# Altium PCB PCB5.PcbDoc
Units mil, origin at the board's own origin, x right, y up, seen from the top; angles counter-clockwise.
Board outline 6000 x 4000 mil, 2 copper layers (Top Layer, Bottom Layer); 86 components, 57 nets, 223 pads, 2 vias.
Unrouted connection lines stored in the file: 23.
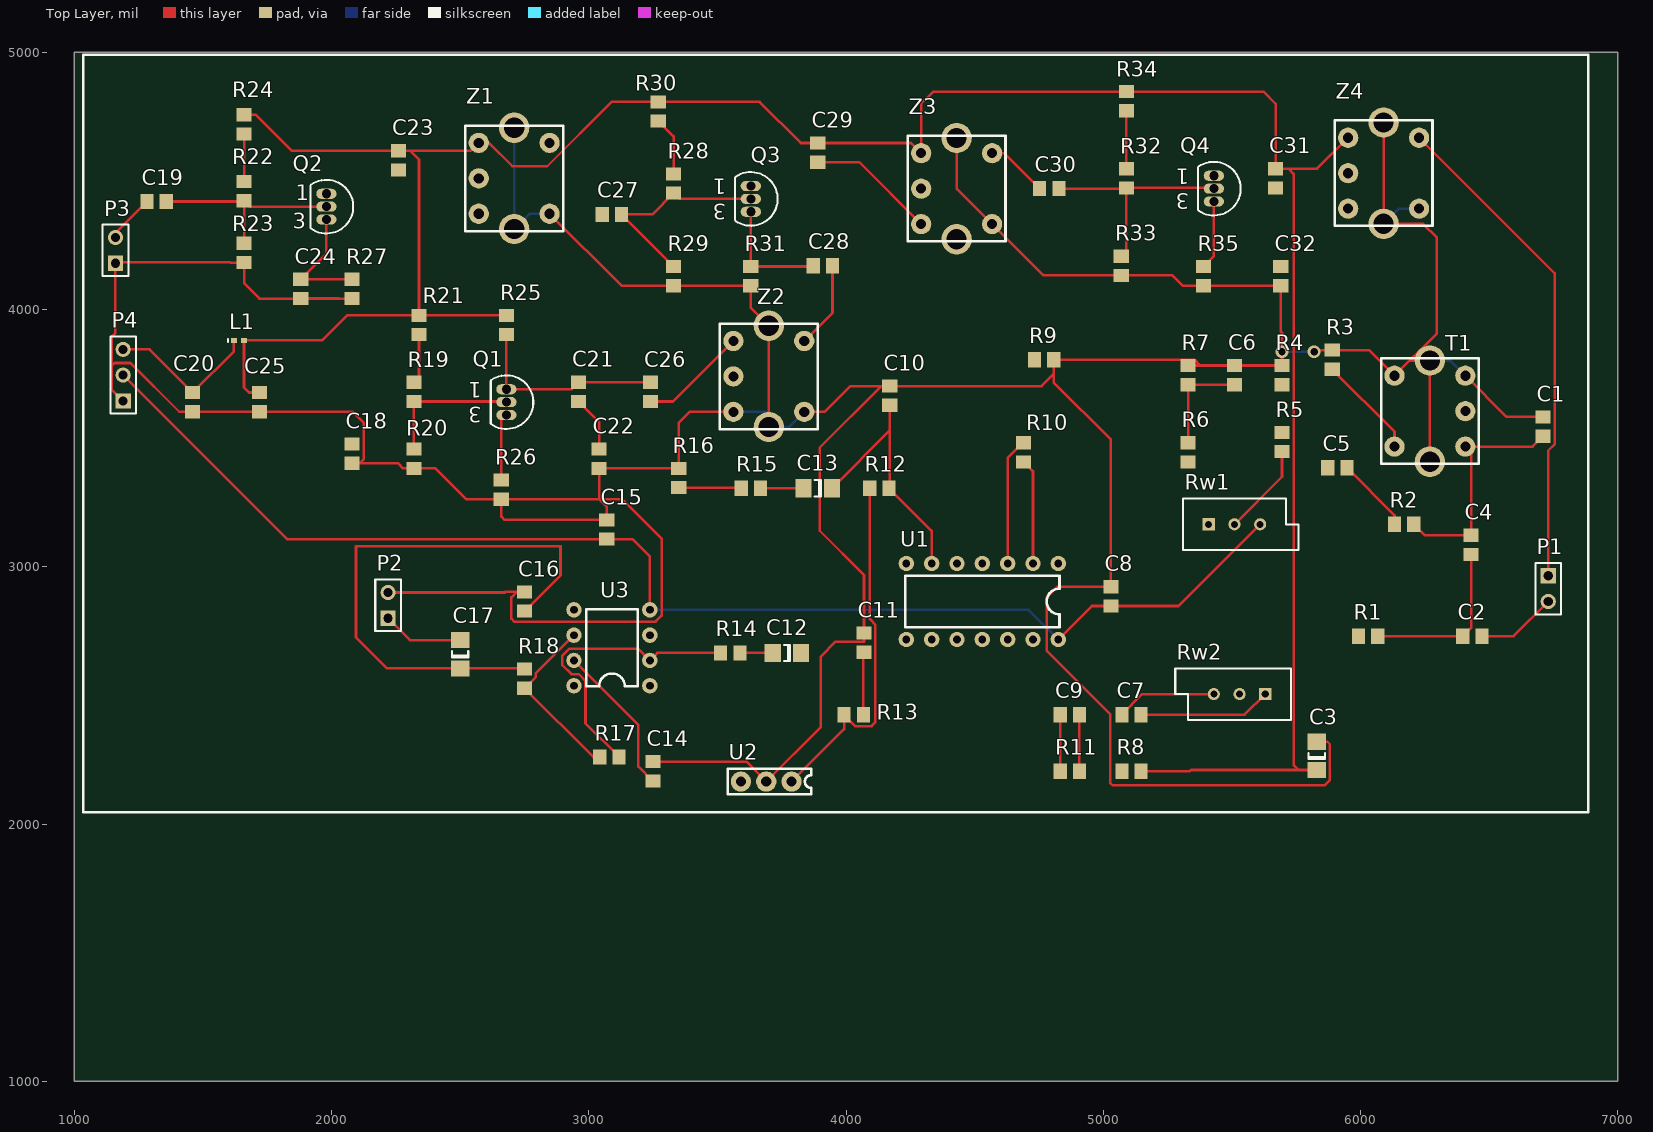
[diagram p0: Top Layer view]
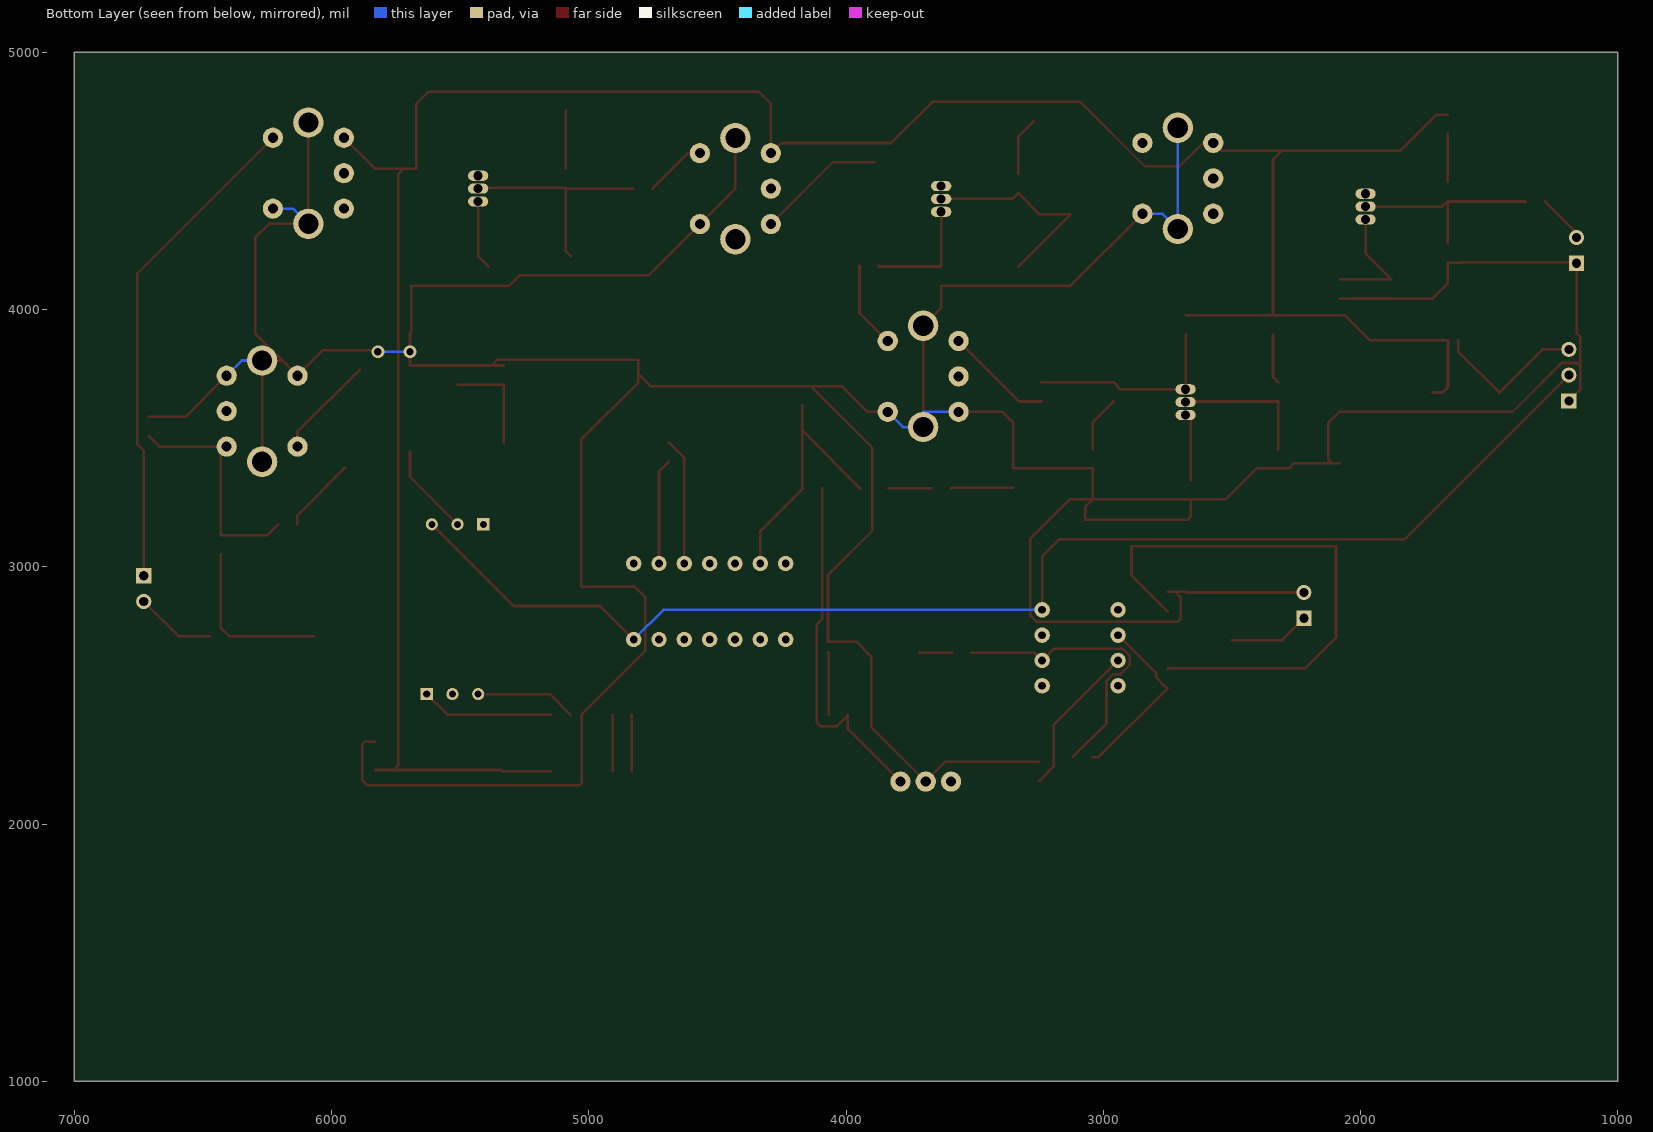
[diagram p1: Bottom Layer view, seen from below]

## Layer stack, top to bottom
Top Layer: signal copper 1.4
Dielectric: dielectric 12.6, FR-4, Dk 4.8
Bottom Layer: signal copper 1.4

## Board outline
1000,1000 7000,1000 7000,5000 1000,5000

## Design rules (kind name [scope] priority, off if disabled: settings)
Clearance [All] p1: gap=10
PolygonConnect [All] p1: connectstyle=Relief reliefconductorwidth=10 reliefentries=4 polygonreliefangle="90 Angle"
RoomDefinition Sheet1 [InComponentClass('Sheet1')] p1: confinementstyle=ConfineIn formatcopy=TRUE lockcomponents=FALSE outline 0,0 2000,0 2000,1000 0,1000
RoomDefinition Sheet2 [InComponentClass('Sheet2')] p2: confinementstyle=ConfineIn formatcopy=TRUE lockcomponents=FALSE outline 0,0 2000,0 2000,1000 0,1000
RoutingVias [All] p1: holewidth=28 width=50 viastyle="Through Hole" minholewidth=28 minwidth=50 maxholewidth=28 maxwidth=50
SilkscreenOverComponentPads [All] p1: minsilkscreentomaskgap=10
SolderMaskExpansion [All] p1: expansion=4
TestPointUsage [All] p1: valid=0 allowmultiple=FALSE
Testpoint [All] p1: side=15 testpointundercomponent=TRUE minsize=40 maxsize=100 preferedsize=60 minholesize=0 maxholesize=40 preferedholesize=32 testpointgrid=1 style=1023 order=0123456789
Width [All] p1: maxlimit=10 minlimit=10 preferedwidth=10
23 further rules are at their usual default settings.

## Classes and differential pairs
component class Sheet2: C18 C19 C20 C21 C22 C23 C24 C25 C26 C27 C28 C29 C30 C31 C32 L1 P3 P4 Q1 Q2 Q3 Q4 R19 R20 R21 R22 R23 R24 R25 R26 R27 R28 R29 R30 R31 R32 R33 R34 R35 Z1 Z2 Z3 Z4
component class Sheet1: C1 C2 C3 C4 C5 C6 C7 C8 C9 C10 C11 C12 C13 C14 C15 C16 C17 P1 P2 R1 R2 R3 R4 R5 R6 R7 R8 R9 R10 R11 R12 R13 R14 R15 R16 R17 R18 Rw1 Rw2 T1 U1 U2 U3

## Components (designator, comment, footprint, x,y, rotation, side; value= is the part's Value field where it differs from the comment)
C1 "Cap" 2012[0805] 6710,3545 r270 top
C2 "Cap" 2012[0805] 6435,2730 r180 top
C3 "Cap Pol1" C1206 5830,2265 r90 top
C4 "Cap" 2012[0805] 6430,3085 r270 top
C5 "Cap" 2012[0805] 5910,3385 r180 top
C6 "Cap" 2012[0805] 5510,3745 r270 top
C7 "Cap" 2012[0805] 5110,2425 r180 top
C8 "Cap" 2012[0805] 5030,2885 r270 top
C9 "Cap" 2012[0805] 4870,2425 r180 top
C10 "Cap" 2012[0805] 4170,3665 r270 top
C11 "Cap" 2012[0805] 4070,2705 r270 top
C12 "Cap Pol1" C1206 3770,2665 r180 top
C13 "Cap Pol1" C1206 3890,3305 r180 top
C14 "Cap" 2012[0805] 3250,2205 r270 top
C15 "Cap" 2012[0805] 3070,3145 r270 top
C16 "Cap" 2012[0805] 2750,2865 r270 top
C17 "Cap Pol1" C1206 2500,2660 r90 top
C18 "Cap" 2012[0805] 2080,3440 r270 top
C19 "Cap" 2012[0805] 1320,4420 r0 top
C20 "Cap" 2012[0805] 1460,3640 r90 top
C21 "Cap" 2012[0805] 2960,3680 r270 top
C22 "Cap" 2012[0805] 3040,3420 r270 top
C23 "Cap" 2012[0805] 2260,4580 r270 top
C24 "Cap" 2012[0805] 1880,4080 r90 top
C25 "Cap" 2012[0805] 1720,3640 r90 top
C26 "Cap" 2012[0805] 3240,3680 r90 top
C27 "Cap" 2012[0805] 3090,4370 r0 top
C28 "Cap" 2012[0805] 3910,4170 r0 top
C29 "Cap" 2012[0805] 3890,4610 r270 top
C30 "Cap" 2012[0805] 4790,4470 r0 top
C31 "Cap" 2012[0805] 5670,4510 r270 top
C32 "Cap" 2012[0805] 5690,4130 r90 top
L1 "Inductor" 0402-A 1640,3880 r0 top
P1 "Header 2" HDR1X2 6730,2965 r270 top
P2 "Header 2" HDR1X2 2220,2800 r90 top
P3 "Header 2" HDR1X2 1160,4180 r90 top
P4 "Header 3" HDR1X3 1190,3645 r90 top
Q1 "NPN" TO-226 2680,3640 r180 top
Q2 "NPN" TO-226 1980,4400 r180 top
Q3 "NPN" TO-226 3630,4430 r180 top
Q4 "NPN" TO-226 5430,4470 r180 top
R1 "Res1" 2012[0805] 6030,2730 r180 top
R2 "Res1" 2012[0805] 6170,3165 r180 top
R3 "Res1" 2012[0805] 5890,3805 r270 top
R4 "Res1" 2012[0805] 5695,3745 r270 top
R5 "Res1" 2012[0805] 5695,3485 r270 top
R6 "Res1" 2012[0805] 5330,3445 r270 top
R7 "Res1" 2012[0805] 5330,3745 r270 top
R8 "Res1" 2012[0805] 5110,2205 r180 top
R9 "Res1" 2012[0805] 4770,3805 r180 top
R10 "Res1" 2012[0805] 4690,3445 r270 top
R11 "Res1" 2012[0805] 4870,2205 r180 top
R12 "Res1" 2012[0805] 4130,3305 r180 top
R13 "Res1" 2012[0805] 4030,2425 r180 top
R14 "Res1" 2012[0805] 3550,2665 r180 top
R15 "Res1" 2012[0805] 3630,3305 r180 top
R16 "Res1" 2012[0805] 3350,3345 r270 top
R17 "Res1" 2012[0805] 3080,2260 r180 top
R18 "Res1" 2012[0805] 2750,2565 r270 top
R19 "Res1" 2012[0805] 2320,3680 r90 top
R20 "Res1" 2012[0805] 2320,3420 r90 top
R21 "Res Adj1" 2012[0805] 2340,3940 r270 top
R22 "Res1" 2012[0805] 1660,4460 r90 top
R23 "Res1" 2012[0805] 1660,4220 r90 top
R24 "Res Adj1" 2012[0805] 1660,4720 r270 top
R25 "Res1" 2012[0805] 2680,3940 r90 top
R26 "Res1" 2012[0805] 2660,3300 r90 top
R27 "Res1" 2012[0805] 2080,4080 r90 top
R28 "Res1" 2012[0805] 3330,4490 r90 top
R29 "Res1" 2012[0805] 3330,4130 r90 top
R30 "Res Adj1" 2012[0805] 3270,4770 r270 top
R31 "Res1" 2012[0805] 3630,4130 r90 top
R32 "Res1" 2012[0805] 5090,4510 r90 top
R33 "Res1" 2012[0805] 5070,4170 r90 top
R34 "Res Adj1" 2012[0805] 5090,4810 r270 top
R35 "Res1" 2012[0805] 5390,4130 r90 top
Rw1 "RPot" VR5 5510,3165 r0 top
Rw2 "RPot" VR5 5530,2505 r180 top
T1 "zhongzhou" zhongzhou 6270,3605 r180 top
U1 "MC1496" MC1496 4530,2865 r180 top
U2 "LM7808" LM7808 3690,2165 r180 top
U3 "LM741" LM741 3090,2685 r180 top
Z1 "zhongzhou1" zhongzhou 2710,4510 r0 top
Z2 "zhongzhou4" zhongzhou 3700,3740 r0 top
Z3 "zhongzhou2" zhongzhou 4430,4470 r0 top
Z4 "zhongzhou3" zhongzhou 6090,4530 r0 top

## Footprints (in the part's own frame and the unit in brackets; to place one, negate y for a bottom-side part, rotate by r counter-clockwise, add the part's x,y. Pads: shape width x height; smd on the part's side, far side on the other; paste and mask are expansions set on the pad)
0402-A [mm] "Chip Inductor; Body 1 x 0.5 mm (LxW typ)"
  rect 0.6x0.5 smd: 1(-0.5,0) 2(0.5,0)
  silkscreen extent -1.1,-0.15 -1.1,0.15
2012[0805] [mm] "Chip Resistor; Body 2.0 x 1.3 mm (LxW typ)"
  rect 1.3x1.5 smd: 1(-0.95,0) 2(0.95,0)
C1206 [mm] "Chip Capacitor; Body 3.2 x 1.6 mm (LxW typ)"
  rect 1.6x1.8 smd: 1(-1.4,0) 2(1.4,0)
  silkscreen extent -0.3,-0.8 0.3,0.8
HDR1X2 [mm] "Connector; Header; 2 Position"
  rect 1.5x1.5 hole 0.9: 1(0,0)
  round 1.5 hole 0.9: 2(2.54,0)
  silkscreen extent -1.27,-1.27 3.81,1.27
HDR1X3 [mm] "Connector; Header; 3 Position"
  rect 1.5x1.5 hole 0.9: 1(0,0)
  round 1.5 hole 0.9: 2(2.54,0) 3(5.08,0)
  silkscreen extent -1.27,-1.27 6.35,1.27
LM741 [mil]
  round 60 hole 30: 1(-147.64,147.64) 2(-147.64,49.21) 3(-147.64,-49.21) 4(-147.64,-147.64) 5(147.64,-147.64) 6(147.64,-49.21) 7(147.64,49.21) 8(147.64,147.64)
  silkscreen extent -100,-150 100,150
LM7808 [mm]
  round 2 hole 1: 1(-2.5,0) 2(0,0) 3(2.5,0)
  silkscreen extent -4.44,-1.27 3.81,1.27
MC1496 [mil]
  round 60 hole 30: 1(-295.28,-147.64) 2(-196.85,-147.64) 3(-98.43,-147.64) 4(0,-147.64) 5(98.43,-147.64) 6(196.85,-147.64) 7(295.28,-147.64) 8(295.28,147.64) 9(196.85,147.64) 10(98.43,147.64) 11(0,147.64) 12(-98.43,147.64) 13(-196.85,147.64) 14(-295.28,147.64)
  silkscreen extent -300,-100 300,100
TO-226 [mm] "TO, Flat Index; 3 In-Line, Axial Leads; Body Dia. 4.8mm; Leads 0.55 x 0.51 mm (max)"
  oval 2x1 hole 0.9: 1(0,-1.27) 2(0,0) 3(0,1.27)
  silkscreen extent -2.65,-2.65 1.55,2.65
VR5 [mm] "Potentiometer; 3 Leads"
  rect 1.2x1.2 hole 0.7: 1(-2.54,0)
  round 1.2 hole 0.7: 2(0,0) 3(2.54,0)
  silkscreen extent -5.08,-2.54 6.35,2.54
zhongzhou [mm]
  round 2 hole 1: 1(-3.5,3.5) 2(-3.5,0) 3(-3.5,-3.5) 4(3.5,-3.5) 5(3.5,3.5)
  round 3 hole 2: 6(0,5) 7(0,-5)
  silkscreen extent -4.83,-5.21 4.83,5.21

## Part data
C1 C2 C4 C5 C6 C7 C8 C9 C10 C11 C14 C15 C16 C18 C19 C20 C21 C22 C23 C24 C25 C26 C27 C28 C29 C30 C31 C32: "Capacitor"
C3 C12 C13 C17: "Polarized Capacitor (Radial)"
P1 P2 P3: "Header, 2-Pin"
P4: "Header, 3-Pin"
Q1 Q2 Q3 Q4: "NPN Bipolar Transistor"
R1 R2 R3 R4 R5 R6 R7 R8 R9 R10 R11 R12 R13 R14 R15 R16 R17 R18 R19 R20 R22 R23 R25 R26 R27 R28 R29 R31 R32 R33 R35: "Resistor"
R21 R24 R30 R34: "Variable Resistor"
Rw1 Rw2: "Potentiometer"

## Via types
v1: diameter 50, hole 28, Top Layer to Bottom Layer, 2 vias

## Nets (pads, with @x,y where several pads share a name; then routed paths per layer and width w, separated by ;. In a path a pad name is that pad's centre, name@x,y a point inside that pad or via, vN(x,y) a via of type N, cw(c..) or ccw(c..) an arc to the next point about the centre after c; other vN are vias at no path point)
+12V: C3.1 C23.1 C25.2 C29.1 C31.1 L1.2 R8.1 R21.1 R24.1 R25.2 R30.1 R34.1 Z1.1 Z3.1 Z4.1 | length 10221.8
  Top Layer w10: R24.1 1705,4757.4 1845,4617.4 C23.1 ; C25.2 1680,3677.4 1659.69,3697.72 L1.2 1963,3880 2060.4,3977.4 R21.1 ; R25.2 2680,3978 R21.1@2340,3978 ; R8.1 5337,2205 5341.88,2209.88 5760,2209.88 ; C3.1 5760,2209.88 ; Z4.1 5831.81,4547.4 5720,4547.4 ; C23.1 2305,4617.4 ; C23.1 2305,4617.4 ; 2305,4617.4 2541.81,4617.4 Z1.1 2612,4647.8 2702.8,4557 2838.6,4557 3089,4807.4 R30.1 3664.6,4807.4 3824.6,4647.4 C29.1 4252.6,4647.4 Z3.1 4292.2,4800 4339.61,4847.4 R34.1 5622.6,4847.4 5670,4800 C31.1 ; 2305,4617.4 2340,4582.4 R21.1@2340,3978 ; R21.1 R21.1@2340,3978 ; R21.1 R21.1@2340,3978 ; C31.1 5720,4547.4 ; C31.1 5720,4547.4 ; 5720,4547.4 5740,4527.4 5740,2229.88 5760,2209.88
-8V: C8.2 C15.2 P4.2 Rw1.3 U1.14 U3.4 | length 5152.5
  Top Layer w10: P4.2 1827.4,3107.6 C15.2 3170.04,3107.6 3237.64,3040 U3.4 ; U1.14 4955.51,2847.6 C8.2 5292.6,2847.6 Rw1.3
  Bottom Layer w10: U3.4 4710,2832.64 U1.14
GND: C1.1 C3.2 C6.1 C8.1 C10.1 C11.1 C14.1 C15.1 C16.1 C18.2 C20.1 C22.2 C24.1 C25.1 C32.1 P2.2 P3.1 P4.1 R3.1 R4.1 R7.1 R9.1 R16.1 R20.1 R23.1 R26.1 R27.1 R29.1 R31.1 R33.1 R35.1 T1.3 T1.4 T1.6 T1.7 U2.2 Z1.4 Z1.6 Z1.7 Z2.3 Z2.4 Z2.6 Z2.7 Z3.4 Z3.6 Z4.4 Z4.6 Z4.7 | length 22173.2
  Top Layer w10: P4.1 1145,3690 ; R27.1 2028.4,4042.6 2028,4043 1880,4043 C24.1 1720,4042.6 1660,4102.6 R23.1 1607.4,4182.6 1607,4183 1163,4183 P3.1 1160,3909 1145,3894 1145,3780 ; P2.2 2673,2900 2675.4,2902.4 2720,2902.4 ; Z1.4 3127.4,4092.6 R29.1 3330,4093 3461,4093 3461.4,4092.6 R31.1 3630,4006.85 Z2.6 Z2.7 ; C14.1 3612.6,2242.4 U2.2 3902,2377 3902,2651 3960,2709 4070,2709 C11.1 4070,2968 3898,3140 3898,3463 4137.4,3702.4 ; Z2.3 3392.2,3602.2 3350,3560 R16.1 3319,3382.4 3318.4,3383 3105,3383 3104.6,3382.6 C22.2 3040,3263 3040.4,3262.6 ; Z2.4 3917.2,3602.2 4017.4,3702.4 4137.4,3702.4 ; Z3.6 4430,4470 Z3.4 4767.4,4132.6 R33.1 5268.4,4132.6 5308.4,4092.6 R35.1 C32.1 5690,3914 5695,3909 v1(5695,3836) ; v1(5820,3836) 5826.4,3842.4 R3.1 6032.6,3842.4 T1.4 ; C3.2 5870.88,2320.12 5881,2310 5881,2171 5860,2150 5037,2150 5027,2160 5027,2427 4780,2674 4780,2880 4823,2923 4976,2923 4976.6,2922.4 C8.1 5030,3494 4807.4,3716.6 4807.4,3749.8 ; Z4.6 Z4.7 6243.85,4333.15 6297,4280 6297,3907.59 6230.63,3841.22 6191.26,3801.85 ; T1.6 T1.7 6191.26,3801.85 ; T1.3 6568.19,3582.4 C1.1 ; 1145,3690 1145,3780 ; 1145,3690 1145,3780 ; 1145,3780 1157,3792 1218.6,3792 1408,3602.6 C20.1 C25.1 2082.4,3602.6 2125,3560 2125,3417.6 2110,3402.6 ; 2110,3402.6 2258,3402.6 2278,3382.6 R20.1 2403.4,3382.6 2523.4,3262.6 R26.1 ; 2110,3402.6 C18.2 2110,3402.6 ; R26.1 3040.4,3262.6 ; R26.1 2660,3195 2672.6,3182.4 C15.1 3070,3233 3040.4,3262.6 ; 2720,2902.4 C16.1 2720,2902.4 ; 2720,2902.4 2699,2881.4 2699,2798 2710,2787 3260,2787 3283,2810 3283,3109 3129.4,3262.6 3040.4,3262.6 ; 4137.4,3702.4 C10.1 ; 4137.4,3702.4 C10.1 ; C10.1 4760,3702.4 4807.4,3749.8 ; 4807.4,3749.8 R9.1 5330,3805 5354.4,3805 5377,3782.4 ; 5377,3782.4 C6.1 R4.1 ; 5377,3782.4 R7.1 5377,3782.4 ; R4.1 v1(5695,3836) ; R4.1 v1(5695,3836) ; T1.4 6191.26,3801.85 ; T1.4 6191.26,3801.85
  Bottom Layer w10: Z1.6 Z1.7 2769.05,4372.2 Z1.4 ; Z2.3 3563,3603 3700,3603 Z2.7 3778.74,3543.15 Z2.4 ; v1(5695,3836) v1(5820,3836) ; Z4.7 6149.05,4392.2 Z4.4 ; T1.7 6348.74,3801.85 T1.3
NetC1_2: C1.2 C4.1 R2.1 T1.1 | length 913.2
  Top Layer w10: R2.1 6250,3122.4 C4.1 6430,3445 T1.1 6669.61,3467.2 C1.2
NetC2_1: C2.1 P1.2 | length 313.5
  Top Layer w10: C2.1 6595,2730 P1.2
NetC2_2: C2.2 C4.2 R1.1 | length 661.2
  Top Layer w10: R1.1 C2.2 6430,2762.4 C4.2
NetC5_1: C5.1 R2.2 | length 296.7
  Top Layer w10: C5.1 6132.6,3199.8 R2.2
NetC5_2: C5.2 R4.2 R5.1 U1.1
NetC6_2: C6.2 R6.1 R7.2 U1.4 | length 405.2
  Top Layer w10: R6.1 R7.2 C6.2
NetC7_1: C7.1 Rw2.1 U1.8 | length 515.7
  Top Layer w10: C7.1 5550,2425 Rw2.1
NetC7_2: C7.2 C9.1 R8.2 R11.1 Rw2.3 | length 611.4
  Top Layer w10: R11.1 C9.1 ; C7.2 5072.6,2426.53 5151.07,2505 Rw2.3
NetC9_2: C9.2 R11.2 | length 220
  Top Layer w10: R11.2 C9.2
NetC10_2: C10.2 C13.1 R12.1 U1.6 | length 1002.7
  Top Layer w10: C13.1 4170,3529.88 ; C10.2 4170,3529.88 ; U1.6 4333.15,3139.25 R12.1 4170,3307.6 4170,3529.88
NetC11_2: C11.2 C12.1 R13.1 U1.12 | length 243.7
  Top Layer w10: R13.1 4067.4,2665 C11.2
NetC12_2: C12.2 R14.1 | length 127.5
  Top Layer w10: R14.1 C12.2
NetC13_2: C13.2 R15.1 | length 167.5
  Top Layer w10: R15.1 C13.2
NetC14_2: C14.2 U2.3 U3.7 | length 596.5
  Top Layer w10: U3.7 3192.64,2385.51 3192.64,2223.43 3248.47,2167.6 C14.2
NetC16_2: C16.2 C17.1 R18.1 | length 2167.1
  Top Layer w10: R18.1 2747.52,2604.88 C17.1 2215.12,2604.88 2095,2725 2095,3080 2890,3080 2890,2966.07 2751.53,2827.6 C16.2
NetC17_2: C17.2 P2.1 | length 315.2
  Top Layer w10: P2.1 2304.88,2715.12 C17.2
NetC18_1: C18.1 Q1.2 R19.1 R20.2 | length 546.3
  Top Layer w10: R20.2 R19.1 2677.4,3642.6 Q1.2
NetC19_1: C19.1 P3.2 | length 190.8
  Top Layer w10: P3.2 1160,4297.4 C19.1
NetC19_2: C19.2 Q2.2 R22.1 R23.2 | length 798.2
  Top Layer w10: C19.2 1657.4,4420 R22.1 ; R23.2 R22.1 ; Q2.2 1682.6,4400 R22.1
NetC20_2: C20.2 L1.1 P4.3 | length 608.4
  Top Layer w10: P4.3 1292.4,3845 C20.2 1620.32,3837.72 L1.1
NetC21_1: C21.1 C26.2 Q1.1 R25.1 | length 783.9
  Top Layer w10: R25.1 Q1.1 2932.6,3690 C21.1 C26.2
NetC21_2: C21.2 C22.1 | length 218.3
  Top Layer w10: C21.2 3040,3562.6 C22.1
NetC23_2: C23.2 Z1.3
NetC24_2: C24.2 Q2.3 R27.2 | length 474
  Top Layer w10: Q2.3 1980,4217.4 C24.2 R27.2
NetC26_1: C26.1 Z2.1 | length 419.6
  Top Layer w10: C26.1 3327.01,3642.6 Z2.1
NetC27_1: C27.1 Z1.5
NetC27_2: C27.2 Q3.2 R28.1 R29.2 | length 832.7
  Top Layer w10: R29.2 C27.2 3247.4,4370 R28.1 3352.6,4430 Q3.2
NetC28_1: C28.1 Q3.3 R31.2 | length 456.3
  Top Layer w10: Q3.3 R31.2 3870,4167.4 C28.1
NetC28_2: C28.2 Z2.5 | length 337.6
  Top Layer w10: Z2.5 3947.4,3987.4 C28.2
NetC29_2: C29.2 Z3.3 | length 501.8
  Top Layer w10: C29.2 4051.81,4572.6 Z3.3
NetC30_1: C30.1 Z3.5 | length 241.9
  Top Layer w10: Z3.5 4614.8,4607.8 C30.1
NetC30_2: C30.2 Q4.2 R32.1 R33.2 | length 878.2
  Top Layer w10: C30.2 5087.4,4470 R32.1 ; R33.2 5090,4227.4 R32.1 ; Q4.2 5427.4,4472.6 R32.1
NetC31_2: C31.2 Z4.3
NetC32_2: C32.2 Q4.3 R35.2 | length 269.2
  Top Layer w10: R35.2 5430,4207.4 Q4.3
NetQ1_3: Q1.3 R26.2 | length 260.9
  Top Layer w10: R26.2 2660,3570 Q1.3
NetQ2_1: Q2.1 Z1.2
NetQ3_1: Q3.1 Z3.2
NetQ4_1: Q4.1 Z4.2
NetR1_2: R1.2 Rw2.2 U1.10
NetR3_2: R3.2 T1.5 | length 400.7
  Top Layer w10: R3.2 6132.2,3525.39 T1.5
NetR5_2: R5.2 Rw1.2 | length 359.2
  Top Layer w10: Rw1.2 5695,3350 R5.2
NetR6_2: R6.2 Rw1.1
NetR9_2: R9.2 U1.5
NetR10_1: R10.1 U1.3 | length 496.2
  Top Layer w10: U1.3 4628.43,3422.36 4688.47,3482.4 R10.1
NetR10_2: R10.2 U1.2 | length 410.2
  Top Layer w10: R10.2 4726.85,3370.75 U1.2
NetR12_2: R12.2 R13.2 U2.1 | length 1408.9
  Top Layer w10: U2.1 3992.6,2369.17 R13.2@3992.6,2423.47 ; R13.2 R13.2@3992.6,2423.47 ; R12.2 4092.6,2796.14 4114.53,2774.21 4114.53,2395.79 4099.21,2380.47 4035.6,2380.47 R13.2@3992.6,2423.47
NetR14_2: R14.2 R17.1 U3.2 | length 1159.4
  Top Layer w10: R17.1 3117.4,2261.53 2987.36,2391.57 2987.36,2556 2961,2582.36 2932.15,2582.36 2897.36,2617.15 2897.36,2654.43 2923.72,2680.79 3192.64,2680.79 U3.2 3266.85,2665 R14.2
NetR15_2: R15.2 R16.2 U3.3 | length 243.7
  Top Layer w10: R16.2 3590,3307.6 R15.2
NetR17_2: R17.2 R18.2 U3.6 | length 690.6
  Top Layer w10: U3.6 2794.53,2586.38 2794.53,2570.6 2751.53,2527.6 R18.2 3017.6,2260 R17.2
NetR19_2: R19.2 R21.2 | length 193.5
  Top Layer w10: R19.2 2340,3737.4 R21.2
NetR22_2: R22.2 R24.2 | length 185.2
  Top Layer w10: R22.2 R24.2
NetR28_2: R28.2 R30.2 | length 230
  Top Layer w10: R30.2 3330,4672.6 R28.2
NetR32_2: R32.2 R34.2 | length 225.2
  Top Layer w10: R32.2 R34.2
ZHONGFANG: P1.1 Z4.5 | length 1931.1
  Top Layer w10: Z4.5 6754.53,4141.06 6754.53,3475.79 6730,3451.27 P1.1
pads on no net: T1.2 U1.7 U1.9 U1.11 U1.13 U3.1 U3.5 U3.8 Z2.2 Z3.7

## Silkscreen, mask and mechanical layers (free items; w line width, h text height)
Top Overlay:
  lines w10: 1035,2045 1035,4880 1035,4905 1035,4965 1035,4990 6885,4990 6885,2045 1035,2045

## Text inside footprints (layer, text, board x,y; h text height)
Q1: Top Overlay "1" at 2584.68,3717.91 h59.05 r180; Top Overlay "3" at 2584.68,3621.61 h59.05 r180
Q2: Top Overlay "1" at 1860,4425 h59.05; Top Overlay "3" at 1850,4315 h59.05
Q3: Top Overlay "1" at 3534.68,4507.91 h59.05 r180; Top Overlay "3" at 3534.68,4411.61 h59.05 r180
Q4: Top Overlay "1" at 5334.69,4547.91 h59.05 r180; Top Overlay "3" at 5334.69,4451.61 h59.05 r180